# Altium PCB Buck Regulator PCB.PcbDoc
Units mm, origin at the board's own origin, x right, y up, seen from the top; angles counter-clockwise.
Board outline 69 x 38 mm, 2 copper layers (Top Layer, Bottom Layer); 16 components, 10 nets, 39 pads, 6 vias.
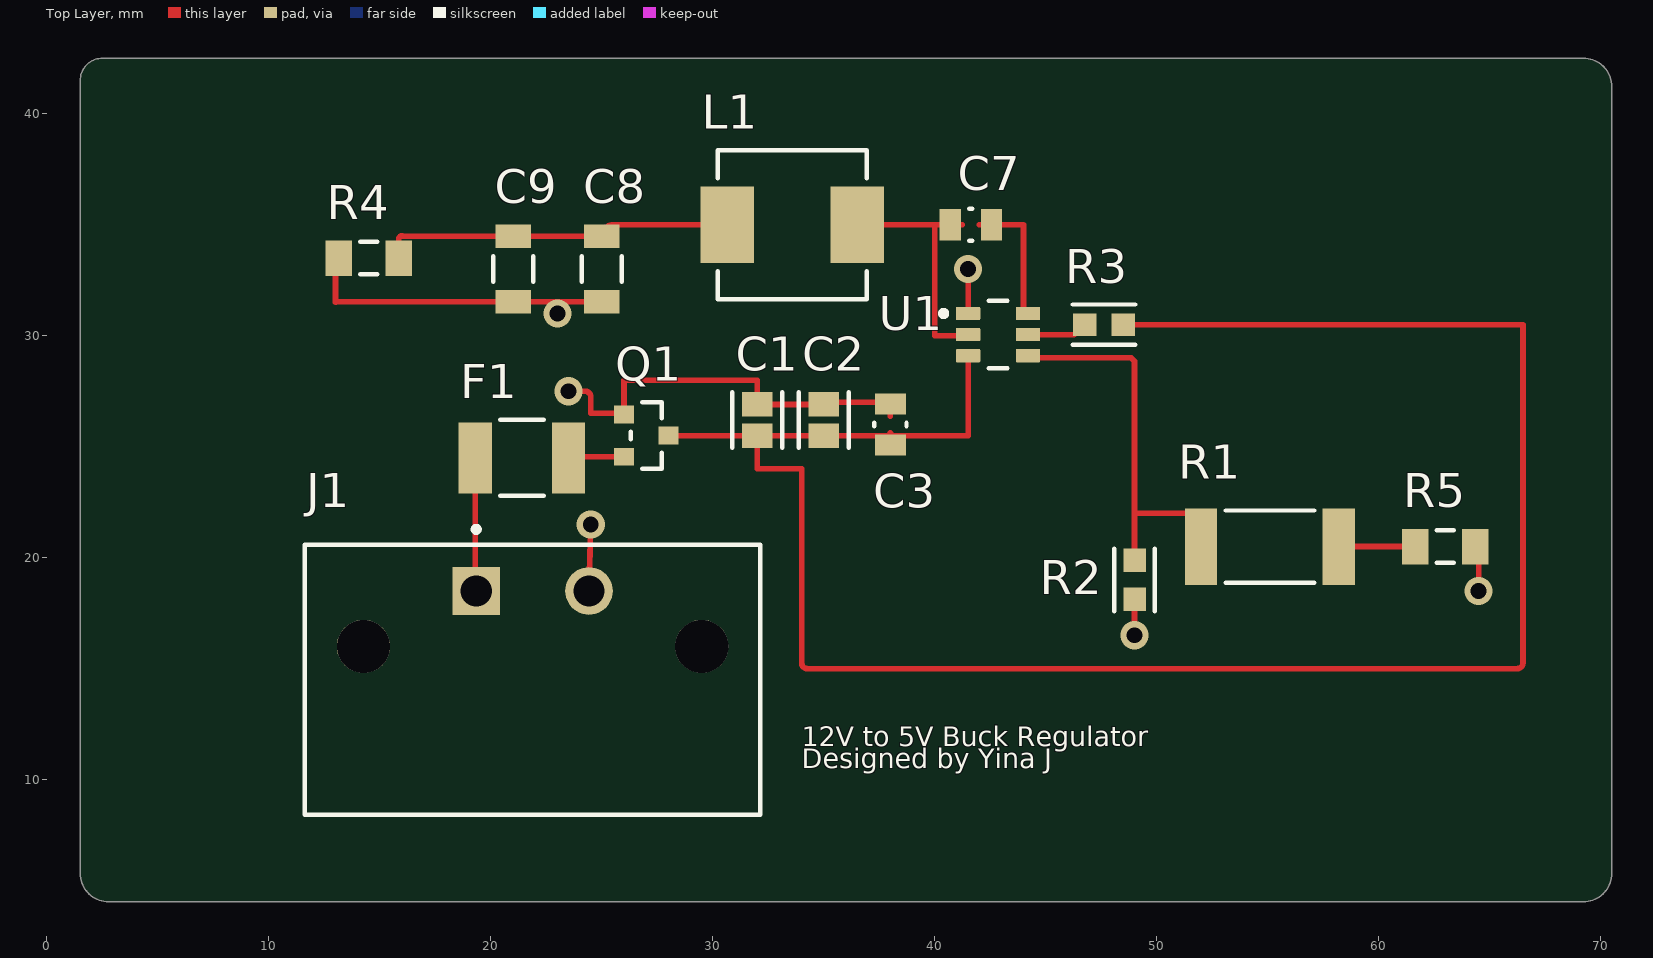
[diagram p0: Top Layer view]
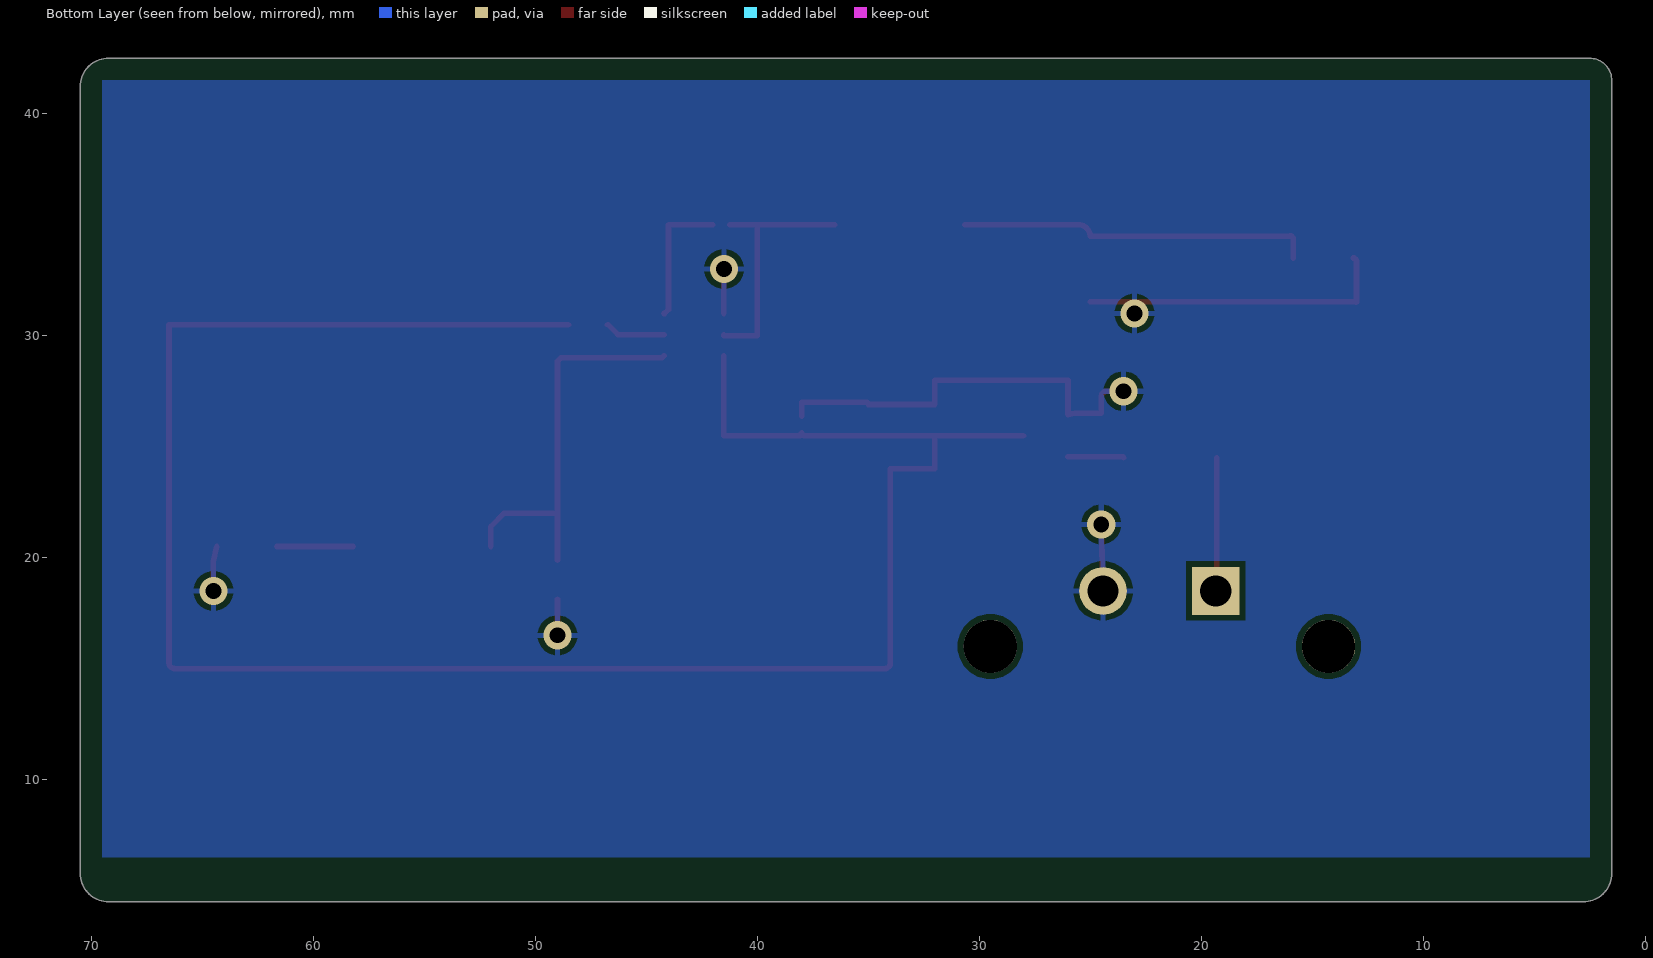
[diagram p1: Bottom Layer view, seen from below]
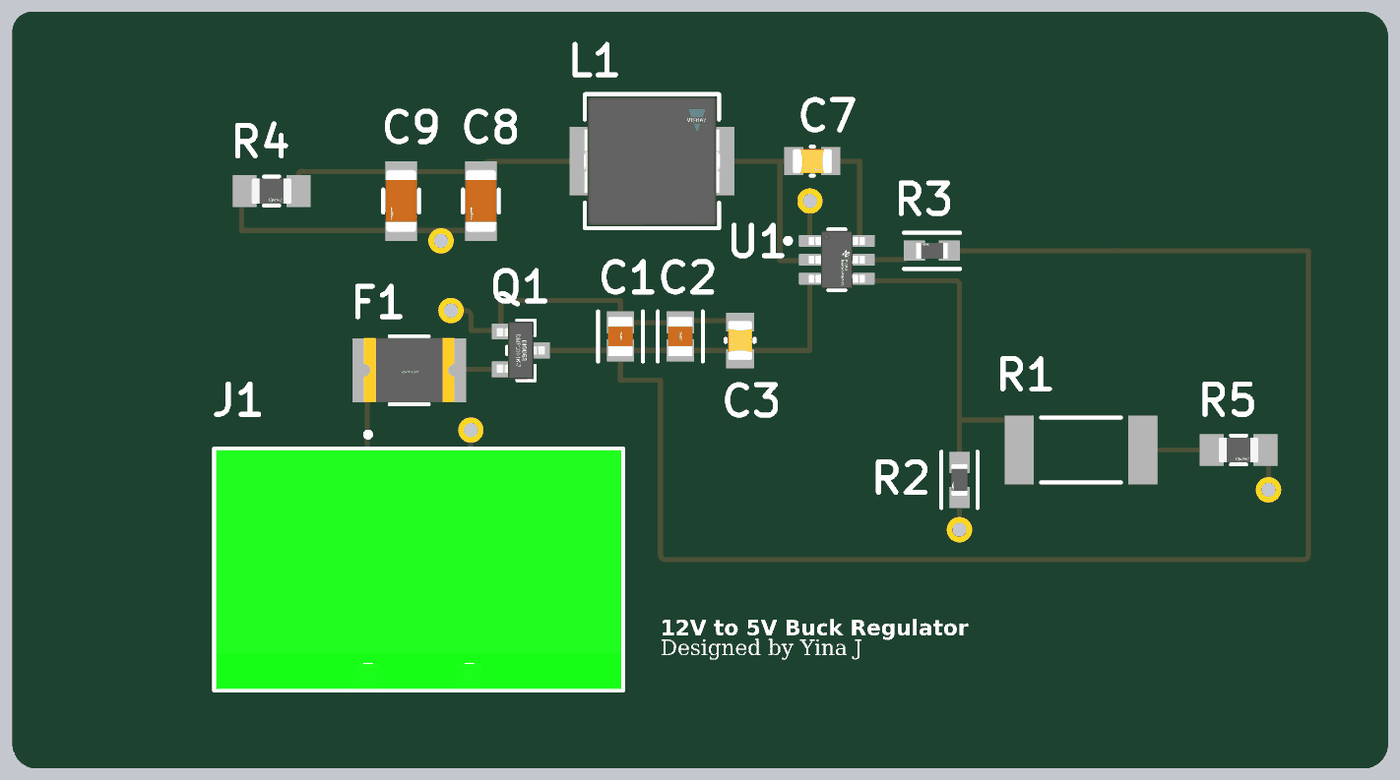
[diagram p2: 3D render of the assembled board from above, using the file's embedded part models]

## Layer stack, top to bottom
Top Solder: solder mask 0.0102, Solder Resist, Dk 3.5
Top Layer: signal copper 0.0356
Dielectric 1: dielectric 0.32, FR-4, Dk 4.8
Bottom Layer: signal copper 0.0356
Bottom Solder: solder mask 0.0102, Solder Resist, Dk 3.5

## Board outline
1.5,5.77 1.5,41.5 cw(c2.5,41.5) 2.5,42.5 69.23,42.5 cw(c69.23,41.23) 70.5,41.23 70.5,5.77 cw(c69.23,5.77) 69.23,4.5 2.77,4.5 cw(c2.77,5.77)

## Design rules (kind name [scope] priority, off if disabled: settings)
Clearance [All] p1: gap=0.254 ignorepadtopadclearanceinfootprint=FALSE
PolygonConnect [All] p1: connectstyle=Relief reliefconductorwidth=0.254 reliefentries=4 polygonreliefangle="90 Angle" airgapwidth=0.254
RoutingVias [All] p1: holewidth=0.711 width=1.27 viastyle="Through Hole" minholewidth=0.711 minwidth=1.27 maxholewidth=0.711 maxwidth=1.27
SolderMaskExpansion [All] p1: expansion=0 istentingtop=FALSE
SupplyNets "Schematic Supply Nets" [InNet('GND')] p1: voltage=0.000
Width [All] p1: maxlimit=0.254 minlimit=0.254 preferedwidth=0.254
30 further rules are at their usual default settings.

## Components (designator, comment, footprint, x,y, rotation, side; value= is the part's Value field where it differs from the comment)
C1 "10 µF" FP-CC0805-EB-IPC_C 32,26.201 r270 top
C2 "10 µF" FP-CC0805-EB-IPC_C 35,26.201 r270 top
C3 "0.1 µF" FP-AC0805-0_85-MFG 38,26 r270 top value="100 nF"
C7 "0.1 µF" FP-AC0805-0_85-MFG 41.621,35 r0 top value="100 nF"
C8 "22 µF" FP-GCM31C-0_2-e0_3_0_8-MFG 25,33 r270 top
C9 "22 µF" FP-GCM31C-0_2-e0_3_0_8-MFG 21,33 r270 top
F1 "1.1A" FP-MF-MSMF110-16-MFG 21.4,24.5 r0 top value=0.04-0.21Ω
J1 "+12 V" FP-1776508-MFG 21.88,14.5 r0 top
L1 "3.3 µH" FP-IHLP-2525CZ-FP_2_413x3-MFG 33.579,35 r0 top
Q1 "P-MOSFET" FP-SOT23-MFG 27,25.5 r0 top
R1 "54.9 kΩ" RESC2512(6432)_M 55.1,20.5 r0 top value="54900.00 Ohm"
R2 "10 kΩ" FP-AC0603-IPC_A 49,19 r270 top
R3 "10k" FP-AC0603-IPC_A 47.623,30.5 r180 top
R4 "5 Ω" FP-RLT1220-F-MFG 14.5,33.5 r0 top
R5 "5 Ω" FP-RLT1220-F-MFG 63,20.5 r0 top
U1 "TPS563208DDCR" FP-DDC0006A-MFG 42.85,30.05 r0 top

## Footprints (in the part's own frame and the unit in brackets; to place one, negate y for a bottom-side part, rotate by r counter-clockwise, add the part's x,y. Pads: shape width x height; smd on the part's side, far side on the other; paste and mask are expansions set on the pad)
FP-1776508-MFG [mm]
  rect 2.15x2.15 hole 1.4 paste-2539.97 mask+0: 1(-2.54,4)
  round 2.15 hole 1.4 paste-2539.97 mask+0: 2(2.54,4)
  round 2.4 hole 2.4 unplated paste-2539.97 mask+0: ""(-7.62,1.5) ""(7.62,1.5)
  silkscreen extent -10.26,-6.07 10.26,6.9, body extent -10.36,-6.17 10.36,6.17, height 0.25
FP-AC0603-IPC_A [mm]
  rect 1.059x1.012 smd paste+0 mask+0: 1(-0.877,0) 2(0.877,0)
  silkscreen extent -1.41,-0.91 1.41,0.91, body extent -1.91,-1.01 1.91,1.01, height 0.25
FP-AC0805-0_85-MFG [mm]
  rect 0.95x1.4 smd paste+0 mask+0: 1(-0.925,0) 2(0.925,0)
  silkscreen extent -0.08,-0.72 0.08,0.72, body extent -1.6,-1.05 1.6,1.05, height 0.25
FP-CC0805-EB-IPC_C [mm]
  rect 1.105x1.362 smd paste+0 mask+0: 1(-0.701,0) 2(0.701,0)
  silkscreen extent -1.25,-1.12 1.25,1.12, body extent -1.35,-0.82 1.35,0.82, height 0.25
FP-DDC0006A-MFG [mm]
  rrect17% 1.1x0.6 smd paste+0 mask+0: 1(-1.35,0.95) 2(-1.35,0) 3(-1.35,-0.95) 4(1.35,-0.95) 5(1.35,0) 6(1.35,0.95)
  silkscreen extent -2.57,-1.53 0.42,1.53, body extent -2,-1.63 2,1.63, height 0.25
FP-GCM31C-0_2-e0_3_0_8-MFG [mm]
  rect 1.05x1.6 smd paste+0 mask+0: 1(-1.475,0) 2(1.475,0)
  silkscreen extent -0.58,-0.9 0.58,0.9, body extent -2.1,-1 2.1,1, height 0.25
FP-IHLP-2525CZ-FP_2_413x3-MFG [mil]
  rect 95x135 smd paste+0 mask+0: 1(-115,0) 2(115,0)
  silkscreen extent -132,-132 132,132, body extent -166,-136 166,136, height 10
FP-MF-MSMF110-16-MFG [mm]
  rect 1.5x3.2 smd paste+0 mask+0: 1(-2.1,0) 2(2.1,0)
  silkscreen extent -0.97,-1.71 0.97,1.71, body extent -2.95,-1.81 2.95,1.81, height 0.25
FP-RLT1220-F-MFG [mm]
  rect 1.2x1.6 smd paste+0 mask+0: 1(-1.35,0) 2(1.35,0)
  silkscreen extent -0.38,-0.72 0.38,0.72, body extent -2.05,-0.9 2.05,0.9, height 0.25
FP-SOT23-MFG [mm]
  rect 0.9x0.8 smd paste+0 mask+0: 1(-1,0.95) 2(-1,-0.95) 3(1,0)
  silkscreen extent -0.7,-1.5 0.7,1.5, body extent -1.55,-1.6 1.55,1.6, height 0.25
RESC2512(6432)_M [mm] "Chip Resistor, Body 6.4x3.2mm, IPC Low Density"
  rect 1.45x3.45 smd: 1(-3.1,0) 2(3.1,0)
  silkscreen extent -2,-1.63 2,1.63, body extent -3.25,-1.7 3.25,1.7, height 0.75

## Part data
C1 C2: library part CMP-03422-001511-1, "CAP CER 10UF 10V X7R 0805", Capacitance=10uF, Case Code (Imperial)=0805, Case Code (Metric)=2012, Dielectric=X7R, Max Operating Temperature=125°C, Min Operating Temperature=-55°C, Resistor Type=Ceramic, Tolerance=10%, Voltage Rating=10V, Case/Package=0805, Construction=Flat, Depth=1.25mm, Halogen Free="Halogen Free", Height=1.6mm, Lead Free="Lead Free", Length=2mm, Mount="Surface Mount", Packaging="Tape and Reel", Radiation Hardening=No, RoHS Compliant=Yes, Series=CC, Thickness=0.057inch, Voltage Rating (DC)=10V, Width=0.049inch
C3 C7: library part CMP-03422-000105-1, "0.10µF 50V Ceramic Capacitor X7R 0805 (2012 Metric) 0.079\" L x 0.049\" W (2.00mm x 1.25mm)", Capacitance="100 nF", Manufacturer=Yageo, Manufacturer Part Number=AC0805KRX7R9BB104, Package=AC0805-0.85, Temperature="-55°C to +125°C", Temperature Characteristic=X7R, Temperature Coefficient=15%, Temperature Range High=+125°C, Temperature Range Low=-55°C, Tolerance=0.1, Voltage Rating="50 V", Automotive=Yes, Automotive Grade="Grade 1", Category=Cap, ComponentLink2Description=Datasheet, ComponentLink2URL=http://www.yageo.com/documents/recent/UPY-AC_NP0X7R_16V-to-630V_12.pdf, Device Class L1="Passive Components", Device Class L2=Capacitors, Device Class L3="Ceramic Capacitors", Digikey Description="0.10µF 50V Ceramic Capacitor X7R 0805 (2012 Metric) 0.079\" L x 0.049\" W (2.00mm x 1.25mm)", Footprint Url=http://www.yageo.com/exep/pages/download/literatures/UPY-C_GEN_24.pdf, Height=0.95mm, Ipc Land Pattern Name=CAPC200125X85, Lead Free=Yes, Material=Ceramic, Octopart=https://octopart.com/ac0805krx7r9bb104-yageo-71334198, RoHS=TRUE
C8 C9: library part CMP-00260-135708682-1, "GCM31CD70J226KE02K Multilayer Ceramic Capacitors MLCC - SMD/SMT 1206 6.3VDC 22 F 10 X7T AEC-Q200", Capacitance=22µF, Case/Package=1206, Max Operating Temperature=125°C, Min Operating Temperature=-55°C, Tolerance=10%, Voltage Rating=6.3V, Height=1.8mm, Lifecycle Status=Production, Material=Ceramic, NexarPartId=135708682
F1: library part CMP-07400-000018-1, "PTC RESET FUSE 16V 1.1A 1812", Ambient Temperature Range High=+85°C, Ambient Temperature Range Low=-40°C, Current Rating=100A, Manufacturer=Bourns, Manufacturer Part Number=MF-MSMF110/16-2, Package=MF-MSMF110/16, Resistance=0.04-0.21Ω, Temperature="-40°C to +85°C", Trip Current=2.2A, Voltage Rating=16V, Automotive=Yes, Automotive Grade="Grade 3", Category=Fuse, ComponentLink2Description=Datasheet, ComponentLink2URL=https://upverter.com/datasheet/72639194a1e73201de7e7957ee4193eb5a54a50e.pdf, Device Class L1="Circuit Protection", Device Class L2="PTC Resettable Fuses", Device Class L3=unset, Digikey Description="PTC RESET FUSE 16V 1.1A 1812", Height=0.85mm, Hold Current=1.1A, Lead Free=Yes, Mouser Description="Resettable Fuses - PPTC 1.1A 16V 0.04ohm", Octopart=https://octopart.com/mf-msmf110%2F16-2-bourns-40767, RoHS=TRUE, Temperature Range High=+85°C, Temperature Range Low=-40°C, Trip Time=0.3s
J1: library part CMP-09399-000017-1, "TERM BLOCK HDR 2POS 90DEG 5.08MM", Color=Green, Current=12A, Flammability Rating="UL94 V-0", Package Quantity=50, Voltage=300V, Voltage Rating=250V, Approvals=CSA, Connector Type=Plug, Contact Material=Tin, Contact Plating=Tin, Current Rating=12A, Depth=12mm, Height=12.1mm, Housing Color=Green, Housing Material=Polybutylene, Lead Free="Lead Free", Length=20.32mm, Max Current Rating=12A, Mount="Through Hole", Number of Contacts=2, Number of Levels=1, Number of Poles=2, Number of Positions=2, Number of Positions Per Level=2, Number of Rows=1, Orientation="Right Angle", Packaging=Bulk, Pitch=5.08mm, RoHS Compliant=Yes, Series=MSTB, Termination=Solder, Weight=5.396916oz, Width=20.32mm
L1: library part CMP-02424-000626-1, "Tin / Lead Inductors, High Saturation Series 3.3uH 6A 30mΩ 20%"
Q1: library part CMP-12801-000029-1, "MOSFET P-CH 20V 600MA SOT23-3", Continuous Drain Current=-600mA, Drain To Source Breakdown Voltage=-20V, Drain To Source Resistance=1.1Ω, Gate To Source Voltage=8V, Input Capacitace At Vds="175pF @ -16V", Manufacturer="Diodes Inc.", Manufacturer Part Number=DMP2004K-7, Max Forward Diode Voltage=-1.2V, Max Junction Temp=+150°C, Package=SOT23, Power Dissipation=550mW, Pulse Drain Current=-1.9A, Temperature="-55°C to +150°C", Temperature Range Low=-55°C, Automotive=No, Category=Trans, ComponentLink2Description=Datasheet, ComponentLink2URL=https://www.diodes.com/assets/Datasheets/ds30933.pdf, Depletion Mode=False, Device Class L1="Discrete Semiconductors", Device Class L2=Transistors, Device Class L3=MOSFETs, Digikey Description="MOSFET P-CH 20V 600MA SOT23-3", Drain To Source Voltage=-20V, Footprint Url=https://www.diodes.com/assets/Package-Files/SOT23.pdf, Height=1.1mm, Lead Free=Yes, Mouser Description="MOSFET P-Channel", Number Of Channels=1, Number Of P Channels=1, Octopart=https://octopart.com/dmp2004k-7-diodes+inc.-7151877, RoHS=TRUE, Rthja Max=227°C/W, Standoff Height=0.013mm, Temperature Range High=+150°C, Threshold Vgs Max=-1V, Threshold Vgs Min=-0.5V, Turn Off Delay Time=20.2ns, Turn On Delay Time=8.5ns
R1: library part CMP-1018-00707-1, "54K9 1W 1% 2512 (6432 Metric)  SMD", Case-EIA=2512, Case-Metric=6432, Power="1 W", Tolerance="1 %", Technology=SMT
R2 R3: library part CMP-03412-040683-1, "RES 10kΩ 5.00% 0.2W 0603"
R4 R5: library part CMP-89038-000005-1, "RES SMD 5 OHM 1% 1/3W 0805"
U1: library part CMP-04918-000356-1, "IC REG BUCK ADJ 3A TSOT23-6", Case/Package=SOT-23-6, Max Input Voltage=17V, Max Operating Temperature=125°C, Max Output Voltage=7V, Min Input Voltage=4.5V, Min Operating Temperature=-40°C, Min Output Voltage=768mV, Output Current=3A, Quiescent Current=400uA, Switching Frequency=580kHz, Lead Free="Lead Free", Mount="Surface Mount", Number of Outputs=1, Output Configuration=Positive, Output Type=Adjustable, Packaging="Tape and Reel", RoHS Compliant=Yes, Synchronous Rectifier=Yes

## Via types
v1: diameter 1.27, hole 0.711, Top Layer to Bottom Layer, 6 vias

## Nets (pads, with @x,y where several pads share a name; then routed paths per layer and width w, separated by ;. In a path a pad name is that pad's centre, name@x,y a point inside that pad or via, vN(x,y) a via of type N, cw(c..) or ccw(c..) an arc to the next point about the centre after c; other vN are vias at no path point)
GND: C1.1 C2.1 C3.1 C8.2 C9.2 J1.2 Q1.1 R2.2 R4.1 R5.2 U1.1 | length 40
  Top Layer w0.254: R4.1 ccw(c13.15,33.35) 13,33.35 13,31.5 cw(c13.025,31.5) 13.025,31.525 C9.2 C8.2 ; v1(23.5,27.5) 24.246,27.5 cw(c24.246,27.246) 24.5,27.246 24.5,26.5 25.677,26.5 Q1.1 26,28 32,28 C1.1 C2.1 cw(c35.098,26.902) 35.098,27 38,27 38,26.379 ; J1.2 v1(24.5,21.5) ; U1.1 v1@41.5,32.5 ; v1@49,17 R2.2 ; R5.2 64.5,19.827 v1@64.5,19
  other v1: 49,16.5 64.5,18.5 23,31 41.5,33
NetC1_2: C1.2 C2.2 C3.2 Q1.3 R3.1 U1.3 | length 95.5
  Top Layer w0.254: Q1.3 C1.2 ; U1.3 41.5,25.5 38.121,25.5 cw(c38.121,25.621) 38,25.621 cw(c37.879,25.621) 37.879,25.5 C2.2 C1.2 ; R3.1 66.5,30.5 66.5,15.254 cw(c66.246,15.254) 66.246,15 34.254,15 cw(c34.254,15.254) 34,15.254 34,24 32,24 C1.2
NetC7_1: C7.1 L1.2 U1.2 | length 11.3
  Top Layer w0.254: L1.2 40,35 ; 41.243,35 40,35 ; U1.2 41.5,30 40,30 40,35
NetC7_2: C7.2 U1.6 | length 6.1
  Top Layer w0.254: 42,35 44,35 44,31.173 44.173,31 U1.6
NetC8_1: C8.1 C9.1 L1.1 R4.2 | length 16.1
  Top Layer w0.254: R4.2 15.85,34.35 cw(c16,34.35) 16,34.5 ccw(c16.025,34.5) 16.025,34.475 C9.1 C8.1 cw(c25.525,34.475) 25.525,35 L1.1
NetF1_1: F1.1 J1.1 | length 6
  Top Layer w0.254: F1.1 19.3,18.54 ccw(c19.34,18.54) J1.1
NetF1_2: F1.2 Q1.2 | length 2.5
  Top Layer w0.254: F1.2 cw(c23.55,24.5) 23.55,24.55 Q1.2
NetR1_1: R1.1 R2.1 U1.4 | length 18
  Top Layer w0.254: U1.4 44.3,29 48.851,29 49,28.851 49,22 ; R2.1 49,22 ; R1.1 52,21.402 51.402,22 49,22
NetR1_2: R1.2 R5.1 | length 3.4
  Top Layer w0.254: R1.2 R5.1
NetR3_2: R3.2 U1.5 | length 2.7
  Top Layer w0.254: U1.5 46.273,30.05 46.723,30.5 R3.2
pads on no net: J1.

## Polygon pours and split planes (outlines as drawn)
GND on Bottom Layer "GND_L02_P000" (solid, pour order 0): 69.5,6.5 2.5,6.5 2.5,41.5 69.5,41.5 2.5,41.5 69.5,41.5

## Silkscreen, mask and mechanical layers (free items; w line width, h text height)
Top Overlay:
  text "12V to 5V Buck Regulator" at 34.001,11.201 h1.52
  text "Designed by Yina J" at 34.001,10.208 h1.52
Mechanical 1:
  lines w0.254: -0.5,0.77 ccw(c0.77,0.77) 0.77,-0.5 ; 1.5,5.77 ccw(c2.77,5.77) 2.77,4.5 69.23,4.5 ccw(c69.23,5.77) 70.5,5.77 70.5,41.23 ccw(c69.23,41.23) 69.23,42.5 2.5,42.5 ccw(c2.5,41.5) 1.5,41.5 1.5,5.77